# Altium PCB H_bridge_v2.PcbDoc
Units mm, origin at the board's own origin, x right, y up, seen from the top; angles counter-clockwise.
Board outline 68.71 x 50 mm, 2 copper layers (Top Layer, Bottom Layer), stack 1.57 mm thick; 13 components, 11 nets, 47 pads, 2 vias.
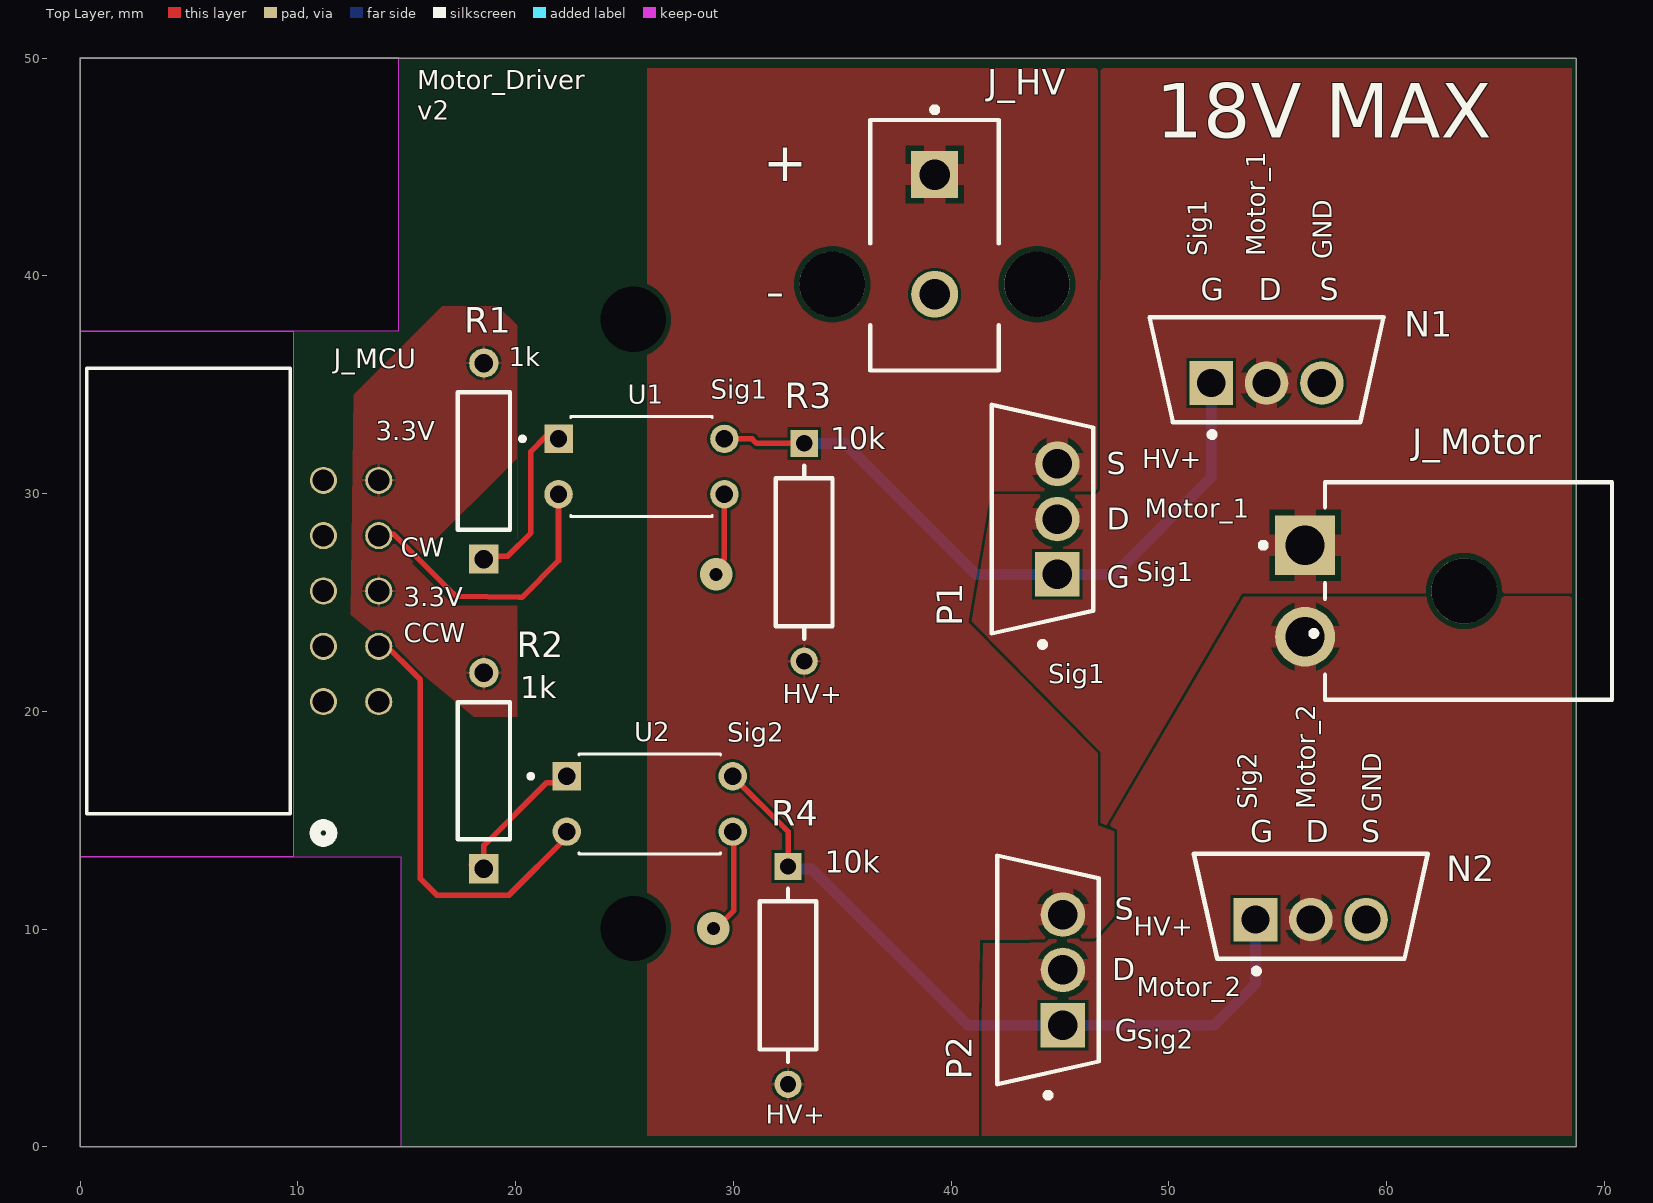
[diagram p0: Top Layer view]
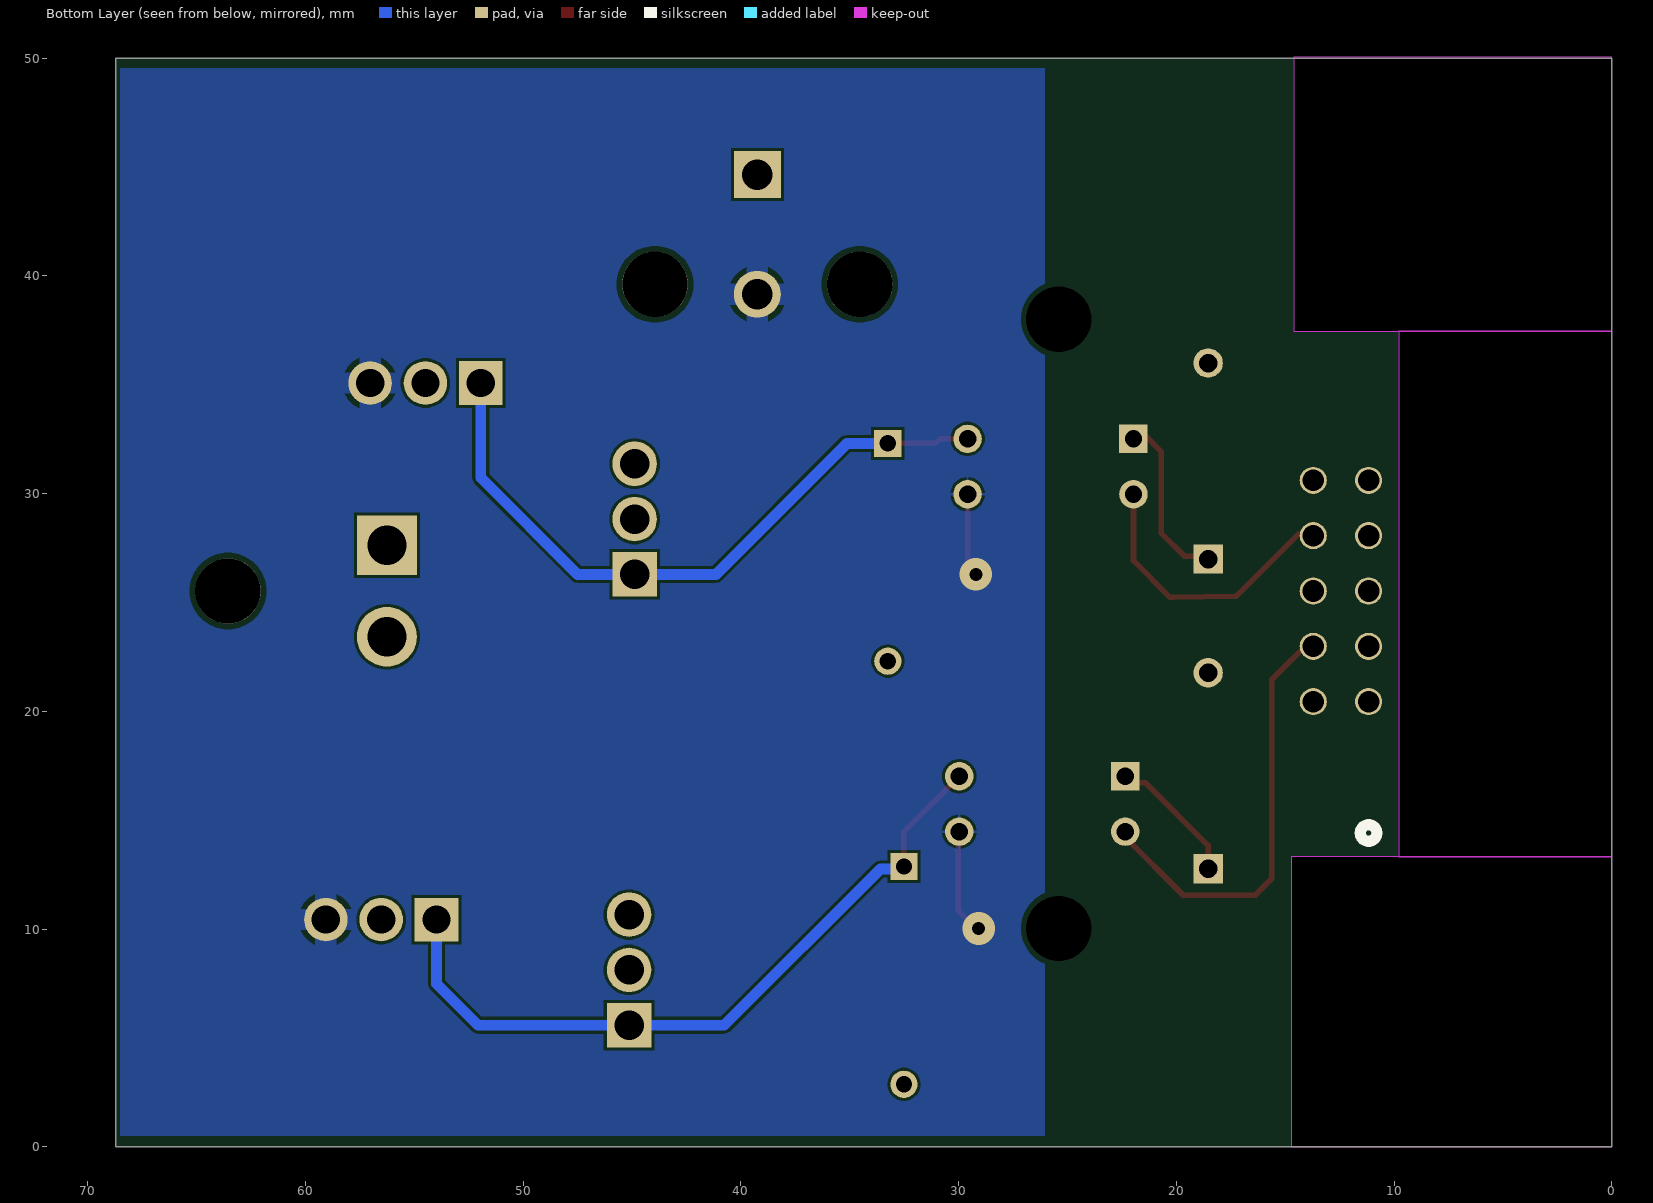
[diagram p1: Bottom Layer view, seen from below]
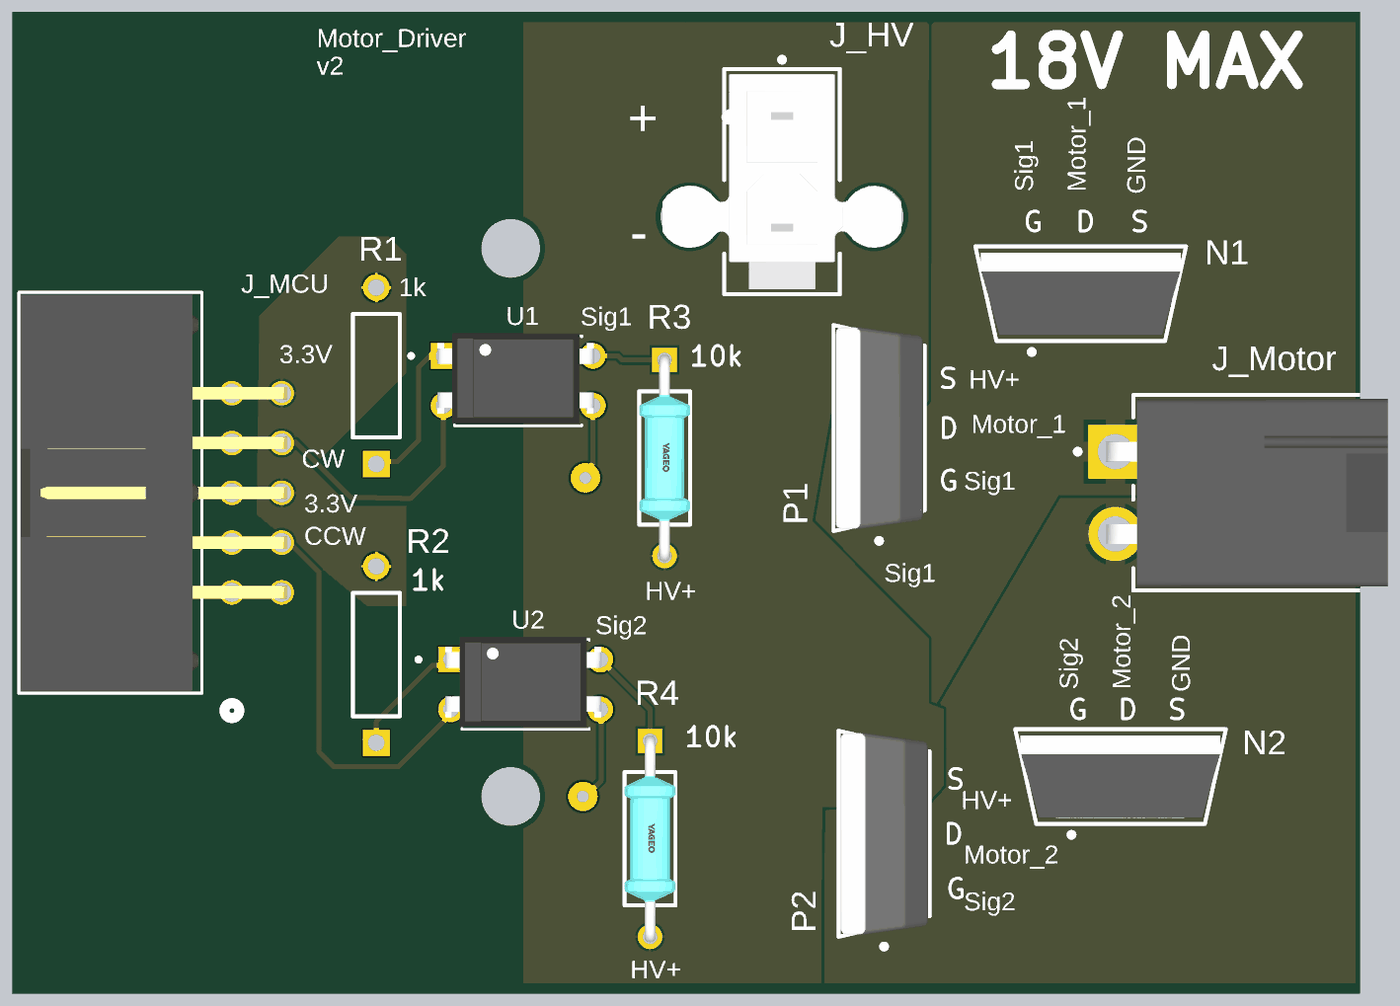
[diagram p2: 3D render of the assembled board from above, using the file's embedded part models]

## Layer stack, top to bottom
Top Solder: solder mask 0.0127, Solder Resist, Dk 3.8
Top Layer: signal copper 0.035
Dielectric: core 1.5, FR-4, Dk 4.5
Bottom Layer: signal copper 0.035
Bottom Solder: solder mask 0.0127, Solder Resist, Dk 3.8

## Board outline
0,0 0,50 68.707,50 68.707,0
cut-out: 9.779,37.465 9.779,13.335 0,13.335 0,37.465
cut-out: 14.605,37.465 0,37.465 0,50.038 14.605,50.038 14.605,37.592
cut-out: 14.732,13.335 14.732,0 0,0 0,13.335

## Design rules (kind name [scope] priority, off if disabled: settings)
BoardOutlineClearance [All] p1: gap=0.2 ignorepadtopadclearanceinfootprint=FALSE
Clearance [All] p1: gap=0.127 ignorepadtopadclearanceinfootprint=FALSE except(0.25: Arc-Hole Track-Hole SMDPad-Hole THPad-Hole Via-Hole Fill-Hole Poly-Hole Region-Hole Text-Hole)
ComponentClearance [All] p1: gap=0.127 collisioncheckmode=3 verticalgap=0.127 showdistances=TRUE
DiffPairsRouting [All] p1: maxlimit=0.254 minlimit=0.127 mostfreqgap=0.127 toplayer_minwidth=0.127 toplayer_maxwidth=25.4 toplayer_prefwidth=0.127 bottomlayer_minwidth=0.127 bottomlayer_maxwidth=25.4 bottomlayer_prefwidth=0.127 maxuncoupledlength=12.7
Height [All] p1: minheight=0 maxheight=1816.048 prefheight=12.7
HoleSize [All] p1: absolutevalues=TRUE maxlimit=6.3 minlimit=0.3 maxpercent=80.000 minpercent=20.000
HoleToHoleClearance [All] p1: gap=0.25 allowstackedmicrovias=FALSE
MinimumAnnularRing [All] p1: minimumring=0.076
MinimumSolderMaskSliver [All] p1: minsoldermaskwidth=0
PlaneClearance [All] p1: clearance=0.127
PlaneConnect PlaneConnectPowerPads [InPadClass('PowerPads')] p1: planeconnectstyle=Direct reliefexpansion=0.508 reliefentries=4 reliefconductorwidth=0.254 reliefairgap=0.254
PlaneConnect [All] p2: pad.planeconnectstyle=Relief pad.reliefexpansion=0.3 pad.reliefentries=4 pad.reliefconductorwidth=0.127 pad.reliefairgap=0.127 via.planeconnectstyle=Direct via.reliefexpansion=0.3 via.reliefentries=4 via.reliefconductorwidth=0.127 via.reliefairgap=0.127
PolygonConnect PolygonConnectPowerPads [All vs (InPadClass('PowerPads'))] p1: connectstyle=Direct reliefconductorwidth=0.254 reliefentries=4 polygonreliefangle="90 Angle" airgapwidth=0.254
PolygonConnect [All] p2: thpad.connectstyle=Relief thpad.reliefconductorwidth=0.127 thpad.reliefentries=4 thpad.polygonreliefangle="90 Angle" thpad.airgapwidth=0.127 smdpad.connectstyle=Relief smdpad.reliefconductorwidth=0.127 smdpad.reliefentries=4 smdpad.polygonreliefangle="90 Angle" smdpad.airgapwidth=0.127 via.connectstyle=Direct via.reliefconductorwidth=0.127 via.reliefentries=4 via.polygonreliefangle="90 Angle" via.airgapwidth=0.127
RoutingVias [All] p1: holewidth=0.3 width=0.6 viastyle="Through Hole" minholewidth=0.3 minwidth=0.6 maxholewidth=0.6 maxwidth=6.6
SilkToSilkClearance [All] p1: silktosilkclearance=0
SilkToSolderMaskClearance [IsPad] p1: minsilkscreentomaskgap=0.127 clearancetoexposedcopper=TRUE
SolderMaskExpansion [All] p1: expansion=0.075 istentingtop=FALSE
SupplyNets "Schematic Supply Nets_3" [InNet('GND')] p1: voltage=0.000
SupplyNets "Schematic Supply Nets_2" [InNet('HV+')] p2: voltage=0.000
SupplyNets "Schematic Supply Nets_1" [InNet('3.3V')] p3: voltage=0.000
Width [All] p1: maxlimit=25.4 minlimit=0.127 preferedwidth=0.127 minimp=50.000000 maximp=50.000000 favimp=50.000000
20 further rules are at their usual default settings.

## Components (designator, comment, footprint, x,y, rotation, side; value= is the part's Value field where it differs from the comment)
J_HV "39-29-9027" FP-39-29-9027-MFG 39.243,41.402 r180 top
J_MCU "SBH11-PBPC-D05-RA-BK" CONN10_D05-RA-BK_SUL 11.176,20.447 r90 top
J_Motor "172648-0102" FP-172648-0102-MFG 63.754,25.527 r90 top
N1 "IRLB3813PBF" FP-PG-TO220-3-MFG 54.483,35.687 r90 top
N2 "IRLB3813PBF" FP-PG-TO220-3-MFG 56.515,11.049 r90 top
P1 "SUP70101EL-GE3" FP-SUP70101EL-GE3-MFG 44.196,28.829 r180 top
P2 "SUP70101EL-GE3" FP-SUP70101EL-GE3-MFG 44.45,8.128 r180 top
R1 "1k" RESA60-630X240 18.542,31.496 r90 top
R2 "1k" RESA60-630X240 18.542,17.272 r90 top
R3 "10k" FP-MF0207-MFG 33.251,27.305 r270 top
R4 "10k" FP-MF0207-MFG 32.512,7.874 r270 top
U1 "LTV816" DIP762W50P254L460H450Q4 25.781,31.242 r0 top
U2 "LTV816" DIP762W50P254L460H450Q4 26.162,15.748 r0 top

## Footprints (in the part's own frame and the unit in brackets; to place one, negate y for a bottom-side part, rotate by r counter-clockwise, add the part's x,y. Pads: shape width x height; smd on the part's side, far side on the other; paste and mask are expansions set on the pad)
CONN10_D05-RA-BK_SUL [mil]
  round 49 hole 39 paste-99999 mask+0: 1(0,0) 2(0,-100) 3(100,0) 4(100,-100) 5(200,0) 6(200,-100) 7(300,0) 8(300,-100) 9(400,0) 10(400,-100)
  silkscreen extent -252,-15 602,428, body extent -198,-111 598,425, height 358
DIP762W50P254L460H450Q4 [mm]
  rect 1.308x1.308 / inner round 1.308 / far side rect 1.308x1.308 hole 0.8: 1(-3.81,1.27)
  round 1.308 hole 0.8: 2(-3.81,-1.27) 3(3.81,-1.27) 4(3.81,1.27)
  silkscreen extent -5.56,-2.3 3.25,2.3, body extent -4.11,-2.17 3.86,2.43, height 5
FP-39-29-9027-MFG [mm]
  rect 2.15x2.15 hole 1.4 paste-2539.97 mask+0: 1(0,-3.25)
  round 2.15 hole 1.4 paste-2539.97 mask+0: 2(0,2.25)
  round 3 hole 3 unplated paste-2539.97 mask+0: ""(-4.7,1.79) ""(4.7,1.79)
  silkscreen extent -2.95,-6.35 2.95,5.75, body extent -6.3,-5.85 6.3,5.85, height 0.25
FP-172648-0102-MFG [mm]
  rect 2.75x2.75 hole 1.8 paste-2539.97 mask+0: 1(2.1,7.5)
  round 2.75 hole 1.8 paste-2539.97 mask+0: 2(-2.1,7.5)
  round 3 hole 3 unplated paste-2539.97 mask+0: ""(0,0.2)
  silkscreen extent -4.99,-6.59 4.99,9.55, body extent -5.09,-6.69 5.09,8.98, height 0.25
FP-MF0207-MFG [mm]
  rect 1.25x1.25 hole 0.75 paste-2539.97 mask+0: 1(-5,0)
  round 1.25 hole 0.75 paste-2539.97 mask+0: 2(5,0)
  silkscreen extent -3.98,-1.3 3.98,1.3, body extent -5.72,-1.4 5.72,1.4, height 0.25
FP-PG-TO220-3-MFG [mm]
  rect 2x2 hole 1.3 paste-2539.97 mask+0: 1(-0.61,2.54)
  round 2 hole 1.3 paste-2539.97 mask+0: 2(-0.61,0) 3(-0.61,-2.54)
  silkscreen extent -3.1,-5.38 2.41,5.38, body extent -2.51,-5.48 2.51,5.48, height 0.25
FP-SUP70101EL-GE3-MFG [mm]
  rect 2.05x2.05 hole 1.35 paste-2539.97 mask+0: 1(-0.683,2.54)
  round 2.05 hole 1.35 paste-2539.97 mask+0: 2(-0.683,0) 3(-0.683,-2.54)
  silkscreen extent -2.32,-5.26 2.32,5.88, body extent -2.42,-5.36 2.42,5.36, height 0.25
RESA60-630X240 [mm] "Axial Resistor, 2-Leads, Dia 2.4mm, Body Length 6.3mm"
  rect 1.35x1.35 hole 0.85: 1(-4.5,0)
  round 1.35 hole 0.85: 2(4.5,0)
  silkscreen extent -3.15,-1.2 3.15,1.2, body extent -3.15,-1.2 3.15,1.2, height 2.4

## Part data
J_HV: library part CMP-04776-000798-1, "CONN HEADER VERT 2POS", Color=Natural, Contact Resistance=10mR, Current Rating=9A, Flammability Rating="UL94 V-0", Insulation Resistance=1GR, Max Current Rating=5A, Max Operating Temperature=105°C, Max Voltage Rating (AC)=600V, Max Voltage Rating (DC)=600.6kV, Min Operating Temperature=-40°C, Contact Gender=Male, Contact Material=Brass, Contact Plating=Tin, Contact Type="Male Pin", Depth=8.77mm, Fastening Type=Ramp, Gender=Female, Glow Wire Compliant=Non-compliant, Halogen Free="Low Halogen", Height=9.91mm, Housing Color=Natural, Housing Material=Nylon, Length=22.15mm, Mount="Through Hole", Number of Circuits=2, Number of Contacts=2, Number of Positions=2, Number of Rows=2, Orientation=Straight, Packaging=Tray, Pitch=4.2mm, Radiation Hardening=No, RoHS Compliant=Yes, Row Spacing=0.165inch, Series="Mini-Fit® Jr™ 5566", Termination=Solder, Voltage Rating=600V, Voltage Rating (DC)=600V
J_MCU: "Description", Manufacturer_Name=Sullins, Copyright="Copyright (C) 2026 Ultra Librarian. All rights reserved.", Manufacturer_Part_Number=SBH11-PBPC-D05-RA-BK, RefDes=RefDes, Type=Type
J_Motor: library part CMP-04776-000216-1, "CONN HEADER R/A 2POS 4.2MM"
N1 N2: library part CMP-32901-000118-1, "MOSFET N-CH 30V 260A TO-220AB", Continuous Drain Current=260A, Drain to Source Breakdown Voltage=30V, Drain to Source Resistance=2mΩ, Gate To Source Voltage=20V, Input Capacitace At Vds="8420pF @ 15V", Manufacturer=Infineon, Max Forward Diode Voltage=1V, Max Junction Temp=+175°C, Package=PG-TO220-3, Power Dissipation=230W, Pulse Drain Current=1050A, Temperature="-55°C to +175°C", Temperature Range Low=-55°C, Automotive=No, Category=Trans, ComponentLink2Description=Datasheet, ComponentLink2URL=https://www.infineon.com/dgdl/irlb3813pbf.pdf?fileId=5546d462533600a4015356603cfe258b, Depletion Mode=False, Device Class L1="Discrete Semiconductors", Device Class L2=Transistors, Device Class L3=MOSFETs, Digikey Description="MOSFET N-CH 30V 260A TO-220AB", Drain To Source Voltage=30V, Footprint Url=https://www.infineon.com/dgdl/po-to220ab-fp.pdf?fileId=5546d462580663ef0158068cfbee01be, Gate Charge At Vgs="57nC @ 4.5V", Height=19.8mm, Lead Free=Yes, Manufacturer Part Number=IRLB3813PBF, Number of Channels=1, Number Of N Channels=1, Octopart=https://octopart.com/irlb3813pbf-infineon-65874923, Reverse Recovery Charge=22nC, Reverse Recovery Time=24ns, RoHS=TRUE, Rthja Max=62°C/W, Standoff Height=3.37mm, Temperature Range High=+175°C, Threshold Vgs Max=2.35V, Threshold Vgs Min=1.35V, Turn Off Delay Time=33ns, Turn On Delay Time=36ns
P1 P2: library part CMP-02550-000106-1, "MOSFET P-CH 100V 120A TO220AB", Continuous Drain Current=-120A, Drain to Source Breakdown Voltage=-100V, Drain to Source Resistance=0.0081Ω, Gate To Source Voltage=20V, Input Capacitace At Vds="7000pF @ -50V", Manufacturer=Vishay, Max Forward Diode Voltage=-1.5V, Max Junction Temp=+175°C, Package=TO-220AB, Power Dissipation=375W, Pulse Drain Current=-240A, Temperature="-55°C to +175°C", Temperature Range Low=-55°C, Typ Forward Diode Voltage=-1V, Automotive=No, Category=Trans, ComponentLink2Description=Datasheet, ComponentLink2URL=http://www.vishay.com/docs/77632/sup70101el.pdf, Depletion Mode=False, Device Class L1="Discrete Semiconductors", Device Class L2=Transistors, Device Class L3=MOSFETs, Digikey Description="MOSFET P-CH 100V 120A TO220AB", Drain To Source Voltage=-100V, Footprint Url=https://www.vishay.com/docs/71195/to220ab.pdf, Gate Charge At Vgs="125nC @ -10V", Height=19.31mm, Ipc Land Pattern Name=TO-220, Lead Free=Yes, Manufacturer Part Number=SUP70101EL-GE3, Number of Channels=1, Number Of P Channels=1, Octopart=https://octopart.com/sup70101el-ge3-vishay-82190902, Reverse Recovery Charge=380nC, Reverse Recovery Time=110ns, RoHS=TRUE, Rthja Max=40°C/W, Standoff Height=3.32mm, Temperature Range High=+175°C, Threshold Vgs Max=-2.5V, Threshold Vgs Min=-1.5V, Transconductance=60S, Turn Off Delay Time=110ns, Turn On Delay Time=20ns
R1 R2: library part CMP-1659-00075-1, "Axial Resistor, 1 KOhm, +/- 1%, 250 mW, -55 to 155 degC, 2-Pin THD, RoHS, Bulk", Case\Package=Axial, Max Operating Temperature="155 degC", Min Operating Temperature="-55 degC", Package Quantity=200, Power Rating="250 mW", Resistance="10 kohm", Tolerance=1%, Voltage Rating="250 V", ComponentLink1Description="Manufacturer URL", ComponentLink1URL=http://www.yageo.com/, ComponentLink2Description=Datasheet, ComponentLink2URL=http://www.yageo.com/documents/recent/Yageo%20LR_MFR_2013.pdf, DatasheetVersion=Apr-13, Length="0.248 inch", PackageDescription="2-Pin Axial Lead, Dia 2.4 mm, Body Length 6.3 mm", PackageReference=MFR-25, Packaging=Bulk, RoHSCompliant=true
R3 R4: library part CMP-03413-000006-1, "RES 10K OHM 1% 0.6W AXIAL", Case/Package=Conformal, Max Operating Temperature=155°C, Min Operating Temperature=-55°C, Resistance=10kR, Resistor Type="Metal Film", Temperature Coefficient=50ppm/°C, Tolerance=1%, Construction=Cylindrical, Contact Plating=Tin, Diameter=2.4mm, Lead Free="Lead Free", Length=6.3mm, Military Standard=Not, Mount="Through Hole", Packaging="Ammo Pack", Radiation Hardening=No, RoHS Compliant=Yes, Termination=Axial
U1 U2: Package=None, Availability=Unavailable, MF="{'manufacturer': u'Lite-On Inc.'}", MP=LTV816, Price=None

## Free pads (board coordinates)
  round 1.524 hole 3 unplated: 2(25.4,10.033) 2(25.4,38)

## Via types
v1: diameter 1.5, hole 0.6, Top Layer to Bottom Layer, 2 vias

## Nets (pads, with @x,y where several pads share a name; then routed paths per layer and width w, separated by ;. In a path a pad name is that pad's centre, name@x,y a point inside that pad or via, vN(x,y) a via of type N, cw(c..) or ccw(c..) an arc to the next point about the centre after c; other vN are vias at no path point)
3.3V: J_MCU.6 J_MCU.10 R1.2 R2.2
CCW: J_MCU.4 U2.2 | length 20.1
  Top Layer w0.254: J_MCU.4@13.843,23.241 15.621,21.463 15.621,12.319 16.383,11.557 19.685,11.557 22.352,14.224 U2.2
CW: J_MCU.8 U1.2 | length 13.1
  Top Layer w0.254: J_MCU.8@13.843,28.321 14.033,28.131 14.414,28.131 17.177,25.368 17.249,25.296 20.178,25.238 20.285,25.238 21.971,26.924 U1.2
GND: J_HV.2 N1.3 N2.3 U1.3 U2.3 | length 9.1
  Top Layer w0.254: v1(29.083,10.033) 29.21,10.033 30.012,10.835 U2.3@30.012,14.803 ; v1(29.21,26.289) 29.21,26.626 29.591,27.007 U1.3
HV+: J_HV.1 P1.3 P2.3 R3.2 R4.2
NetJ_Motor_1: J_Motor.1 N1.2 P1.2
NetJ_Motor_2: J_Motor.2 N2.2 P2.2
NetR1_1: R1.1 U1.1 | length 7.3
  Top Layer w0.254: R1.1@18.542,27.123 19.63,27.123 20.701,28.194 20.701,31.932 U1.1@21.408,32.639
NetR2_1: R2.1 U2.1 | length 6.1
  Top Layer w0.254: R2.1@17.962,12.954 R2.1@18.451,12.954 ; R2.1@18.542,12.954 18.542,13.843 21.43,16.731 U2.1@22.065,16.731
signal_1: N1.1 P1.1 R3.1 U1.4 | length 31.1
  Top Layer w0.254: U1.4 30.861,32.512 31.068,32.305 R3.1
  Bottom Layer w0.5: R3.1 35.132,32.305 41.148,26.289 P1.1 47.498,26.289 51.943,30.734 N1.1
signal_2: N2.1 P2.1 R4.1 U2.4 | length 33.4
  Top Layer w0.254: U2.4 32.512,14.478 R4.1
  Bottom Layer w0.5: R4.1 32.625,12.761 33.594,12.761 40.767,5.588 P2.1 52.07,5.588 53.975,7.493 N2.1
pads on no net: J_HV. J_MCU.1 J_MCU.2 J_MCU.3 J_MCU.5 J_MCU.7 J_MCU.9 J_Motor.

## Polygon pours and split planes (outlines as drawn)
GND on Bottom Layer "NONET_L-01_P-001" (solid, remove dead copper, pour order 1): 26.035,49.53 68.58,49.53 68.58,0.508 26.035,0.508
NetJ_Motor_1 on Top Layer "NETJ_MOTOR_1_L01_P005" (solid, pour order 5): 46.736,49.53 68.58,49.53 68.58,25.434 53.355,25.398 46.258,13.283 40.402,23.5 45.022,45.149 46.736,46.863
NetJ_Motor_2 on Top Layer "NETJ_MOTOR_2_L01_P006" (solid, pour order 6): 46.892,9.695 46.59,9.572 41.472,9.487 41.266,0.508 46.736,0.508 68.58,0.508 68.58,25.527 51.425,25.474 53.002,25.474 46.892,17.023
HV+ on Top Layer "HV+_L01_P004" (solid, remove dead copper, pour order 4): 41.266,5.65 41.303,9.484 46.59,9.572 47.498,10.588 47.498,14.492 46.736,14.78 46.736,21.971 46.736,18.077 40.787,24.084 41.827,30.118 42.136,30.118 42.325,30.115 46.736,30.091 46.712,30.115 46.736,49.53 26.035,49.53 26.035,0.508 41.266,0.508
3.3V on Top Layer "3.3V_L01_P007" (solid, remove dead copper, pour order 7): 13.843,35.814 16.637,38.608 19.177,38.608 20.066,37.719 20.066,19.748 18.069,19.748 12.436,24.427 12.573,34.544 13.462,35.433

## Other copper
Top Layer:
  pour cut-out: 20.066,31.623 15.24,26.797 17.185,24.852 20.066,24.852

## Silkscreen, mask and mechanical layers (free items; w line width, h text height)
Top Overlay:
  text "Motor_Driver" at 15.494,48.273 h1.5
  text "v2" at 15.494,46.863 h1.5
  text "18V MAX" at 49.395,46.347 h2.5
  text "+" at 31.369,43.759 h3
  text "Sig1" at 52.042,40.894 h1.5 r90
  text "Motor_1" at 54.725,40.894 h1.5 r90
  text "GND" at 57.768,40.767 h1.5 r90
  text "G" at 51.458,38.885 h1
  text "D" at 54.125,38.885 h1
  text "S" at 56.919,38.885 h1
  text "-" at 31.496,37.904 h3
  text "1k" at 19.685,35.56 h1.5
  text "Sig1" at 28.956,34.064 h1.5
  text "3.3V" at 13.589,32.148 h1.5
  text "10k" at 34.44,32.027 h1
  text "S" at 47.14,30.884 h1
  text "HV+" at 48.768,30.861 h1.5
  text "Motor_1" at 48.895,28.587 h1.5
  text "D" at 47.14,28.344 h1
  text "CW" at 14.732,26.813 h1.5
  text "G" at 47.14,25.677 h1
  text "Sig1" at 48.514,25.682 h1.5
  text "3.3V" at 14.859,24.528 h1.5
  text "CCW" at 14.859,22.876 h1.5
  text "Sig1" at 44.45,20.983 h1.5
  text "1k" at 20.216,20.597 h1
  text "HV+" at 32.258,20.066 h1.5
  text "Sig2" at 29.718,18.316 h1.5
  text "Sig2" at 54.328,15.494 h1.5 r90
  text "Motor_2" at 57.011,15.494 h1.5 r90
  text "GND" at 60.054,15.367 h1.5 r90
  text "G" at 53.744,13.993 h1
  text "D" at 56.284,13.993 h1
  text "S" at 58.824,13.993 h1
  text "10k" at 34.186,12.596 h1
  text "S" at 47.521,10.437 h1
  text "HV+" at 48.387,9.398 h1.5
  text "D" at 47.394,7.643 h1
  text "Motor_2" at 48.514,6.616 h1.5
  text "G" at 47.521,4.849 h1
  text "Sig2" at 48.514,4.219 h1.5
  text "HV+" at 31.496,0.762 h1.5